# EAGLE board Final_v2 (EAGLE 8.6.3)
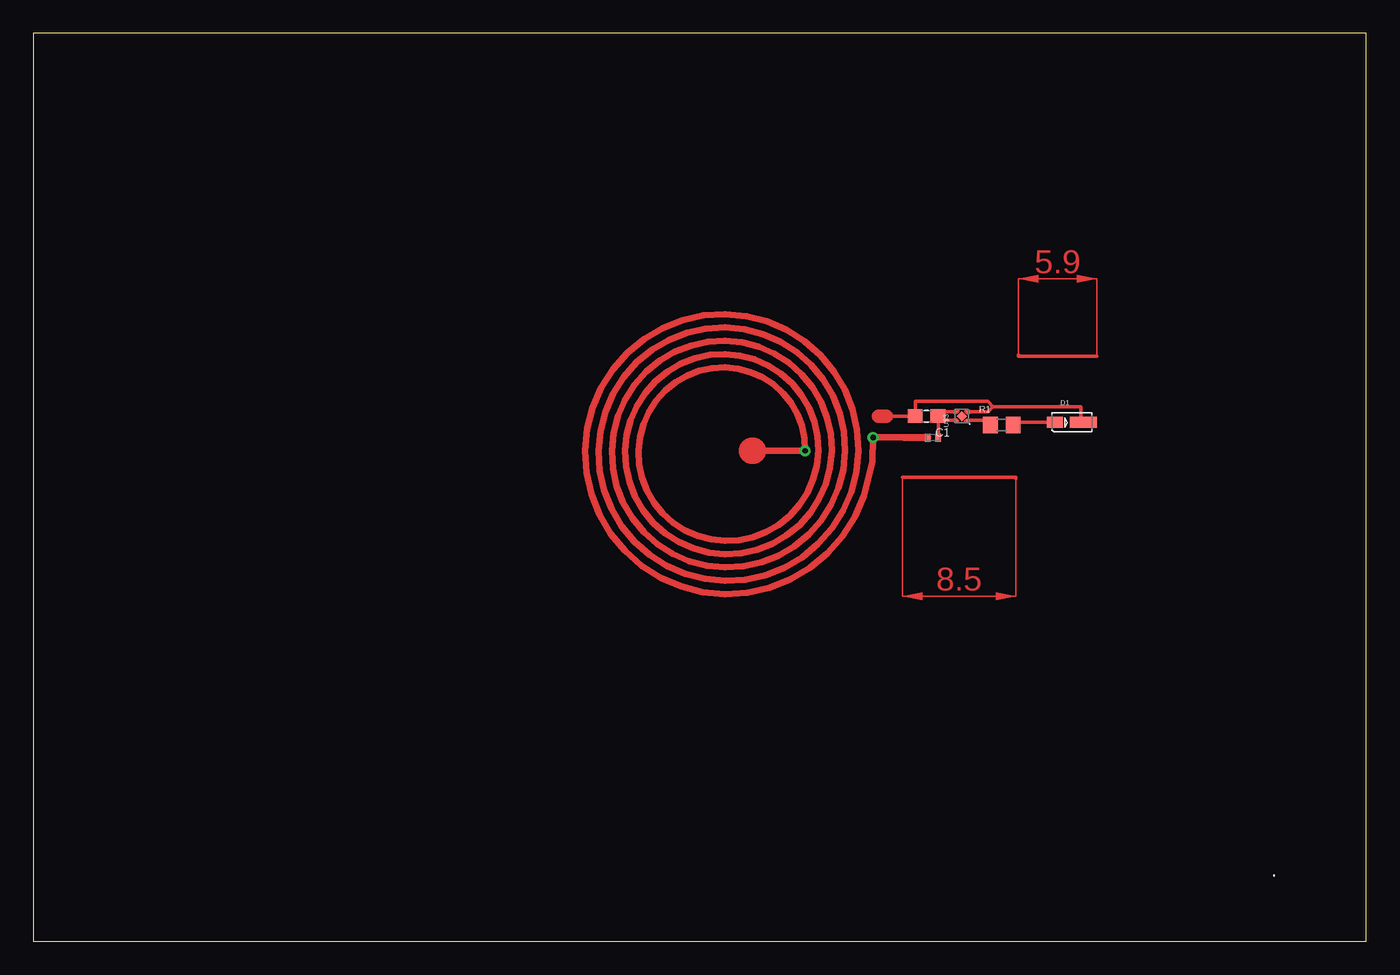
[diagram p0: board, top side]

Size 100 x 68.11 mm. Coordinates in mm from the lower left corner, seen from the top.
Outline: 0,0 100,0 100,68.11 0,68.11 0,0
Copper layers (1*16): Top 0.035mm / dielectric 1.5mm / Bottom 0.035mm
Design rules "default": minimum track width 6mil, minimum drill 0.35mm, track to track 6mil, track to pad 6mil, pad to pad 6mil, via to via 6mil, smd to smd 6mil, copper to edge 40mil, drill to drill 6mil, minimum pad ring 10mil, minimum via ring 8mil, stop-mask expansion 4mil, vias tented up to drill 0mil, thermal gap 10mil

## Footprints (pad centres in the part's own frame; a part is rotated, then mirrored left to right if it is on the bottom)
CAPC1608X90 = smd 1.1 x 1: 1 -0.85,0; 2 0.85,0
WL-SWTP_3014 = smd 2 x 0.8: 1 0.88,0 | smd 1.2 x 0.8: 2 -1.27,0
RESC1608X55 = smd 1.1 x 1.25: 1 -0.85,0; 2 0.85,0
0402_MURATA = smd 0.4 x 0.6: P$1 -0.4,0; P$2 0.4,0
REG_NCP160AMX180TBG = smd 0.1 x 0.1: 1 -0.325,-0.4; 2 0.325,-0.4; 3 0.325,0.4; 4 -0.325,0.4 | smd 0.52 x 0.52 rotated 45: 5 0,0

## Placement (x,y rotation side)
C1  06036D225KAT2A  [CAPC1608X90]  67.02,39.4 180 top
D1  WL-SWTP3014  [WL-SWTP_3014]  77.9,38.94 0 top
R1  CRCW06033K30FKEA  [RESC1608X55]  72.66,38.73 0 top
U$2  SCHOTTKY0402  [0402_MURATA]  67.49,37.79 0 top
U$3  NCP161_711AJ  [REG_NCP160AMX180TBG]  69.66,39.4 90 top

## Library data of the parts
C1 = Capacitor_2.2uF_0603; DESCRIPTION: 0603 2.2 uF 6.3 V ±10 % Tolerance X5R Surface Mount Multilayer Ceramic Capacitor; DIGI-KEY_PART_NUMBER: 478-1252-1-ND; DIGI-KEY_PURCHASE_URL: https://www.digikey.co.uk/product-detail/en/avx-corporation/06036D225KAT2A/478-1252-1-ND/564284?utm_source=snapeda&utm_medium=aggregator&utm_campaign=symbol; MF: AVX; MP: 06036D225KAT2A; PACKAGE: 0603 AVX
D1 = WL-SWTP; DESCRIPTION: SMD LED PLCC2 Daylight white 120 ° 3.2 V Wuerth Elektronik; DIGI-KEY_PART_NUMBER: 732-5661-1-ND; DIGI-KEY_PURCHASE_URL: https://www.digikey.co.uk/product-detail/en/wurth-electronics-inc/158301250/732-5661-1-ND/4947879?utm_source=snapeda&utm_medium=aggregator&utm_campaign=symbol; MF: Wurth Electronics; MP: 158301250; PACKAGE: 1206 Würth Elektronik
R1 = CRCW06033K30FKEA; DESCRIPTION: Res Thick Film 0603 3.3K Ohm 1% 0.1W_1/10W_ ?100ppm/C SMD Automotive Paper T/R; DIGI-KEY_PART_NUMBER: 541-3.30KHCT-ND; DIGI-KEY_PURCHASE_URL: https://www.digikey.com/product-detail/en/vishay-dale/CRCW06033K30FKEA/541-3.30KHCT-ND/1179866?utm_source=snapeda&utm_medium=aggregator&utm_campaign=symbol; MF: Vishay Dale; MP: CRCW06033K30FKEA; PACKAGE: 0603 Vishay
U$2 = Schottki_0402
U$3 = NCP160AMX180TBG

## Nets
GND: C1.2 D1.1 U$3.2
IN: C1.1 U$2.P$2 U$3.3 U$3.4
IN+: U$2.P$1
N$2: D1.2 R1.2
OUT: R1.1 U$3.1

## Tracks (layer width: path | path; a pad name or v marks a point on that pad's centre or on a via)
GND
  Top 0.254: 64,39.4 C1.2 66.17,40.5 71.6,40.5 72,40.1 | D1.1 78.6,39.12 78.6,40.1 72,40.1 | U$3.2 71.62,39.73 72,40.1
  Top 1.016: 64,39.4 63.4,39.4
IN
  Top 0.254: 67.89,39.2 67.89,39.38 C1.1 68.19,39.73 U$3.3 | 67.89,39.2 U$2.P$2 | U$3.4 68.02,39.08 67.89,39.2
IN+  (via drill 0.4 pad 0.5)
  Top 0.5: 65.4,37.8 v63,37.8 62.94,35.98 62.31,33.42 61.63,31.84 60.72,30.39 59.59,29.11 58.28,28.02 56.81,27.16 55.24,26.53 53.59,26.16 51.9,26.05 50.22,26.21 48.59,26.62 47.05,27.29 45.64,28.18 44.39,29.29 43.32,30.57 42.48,32 41.87,33.54 41.51,35.15 41.4,36.8 41.55,38.44 41.96,40.03 42.61,41.53 43.49,42.91 44.56,44.14 45.82,45.17 47.21,46 48.72,46.6 50.29,46.95 51.9,47.05 53.5,46.9 55.05,46.5 56.52,45.87 57.87,45.01 59.06,43.96 60.07,42.74 60.88,41.37 61.46,39.91 61.8,38.37 61.9,36.8 61.75,35.24 61.36,33.73 60.74,32.29 59.91,30.98 58.88,29.82 57.69,28.83 56.36,28.05 54.93,27.48 53.43,27.14 51.9,27.05 50.38,27.2 48.9,27.57 47.51,28.18 46.23,28.99 45.09,29.99 44.13,31.16 43.37,32.45 42.82,33.85 42.49,35.31 42.4,36.8 42.54,38.28 42.91,39.72 43.5,41.08 44.3,42.33 45.27,43.43 46.4,44.36 47.67,45.11 49.03,45.65 50.45,45.96 51.9,46.05 53.34,45.91 54.74,45.55 56.06,44.98 57.28,44.2 58.35,43.25 59.26,42.15 59.99,40.92 60.51,39.6 60.81,38.21 60.9,36.8 60.76,35.4 60.41,34.03 59.85,32.75 59.1,31.57 58.18,30.52 57.1,29.64 55.91,28.94 54.62,28.43 53.27,28.13 51.9,28.05 50.53,28.18 49.21,28.53 47.96,29.07 46.82,29.8 45.8,30.7 44.94,31.75 44.26,32.91 43.77,34.16 43.48,35.47 43.4,36.8 43.53,38.13 43.86,39.41 44.39,40.62 45.1,41.74 45.98,42.72 46.99,43.55 48.12,44.22 49.34,44.69 50.6,44.97 51.9,45.05 53.19,44.92 54.43,44.6 55.61,44.08 56.69,43.39 57.65,42.55 58.45,41.56 59.09,40.47 59.56,39.29 59.83,38.05 59.9,36.8 59.78,35.55 59.46,34.34 58.96,33.2 58.29,32.16 57.47,31.23 56.51,30.45 55.45,29.83 54.31,29.38 53.12,29.12 51.9,29.05 50.69,29.17 49.52,29.48 48.42,29.96 47.4,30.61 46.51,31.41 45.75,32.33 45.15,33.36 44.72,34.47 44.47,35.62 44.4,36.8 44.52,37.97 44.81,39.1 45.28,40.17 45.91,41.15 46.69,42.02 47.58,42.75 48.58,43.33 49.64,43.74 50.76,43.98 51.9,44.05 53.03,43.94 54.12,43.65 55.16,43.19 56.1,42.58 56.94,41.84 57.64,40.97 58.2,40.01 58.6,38.98 58.84,37.9 58.9,36.8 58.79,35.71 58.51,34.65 58.07,33.66 57.48,32.74 56.76,31.94 55.93,31.26 55,30.72 54,30.33 52.96,30.11 51.9,30.05 50.85,30.16 49.83,30.43 48.87,30.85 47.99,31.42 47.22,32.12 46.56,32.92 46.04,33.81 45.67,34.78 45.45,35.78 45.4,36.8 45.51,37.81 45.77,38.79 46.17,39.72 46.72,40.56 47.39,41.31 48.17,41.94 49.03,42.44 49.95,42.79 50.92,43 51.9,43.05 52.87,42.95 53.82,42.7 54.7,42.3 55.52,41.78 56.23,41.13 56.84,40.39 57.31,39.56 57.65,38.67 57.85,37.74 v57.9,36.8 54,36.8
  Top 0.508: U$2.P$1 65.29,37.79 65.4,37.8
  Top 2: 54,36.8 53.9,36.8
N$1
  Top 0.254: 65.2,34.8 73.7,34.8 73.7,34.7
N$2
  Top 0.254: D1.2 73.72,38.94 R1.2
N$3
  Top 0.254: 73.9,44 73.9,43.9 79.8,43.9
OUT
  Top 0.254: U$3.1 71.36,39.08 R1.1
(copper drawn outside any net)
  shapes: Top area x2